# Altium PCB PCB.PcbDoc (part 2 of 2)
Units mm, origin at the board's own origin, x right, y up, seen from the top; angles counter-clockwise.
Board outline 57.59 x 65.03 mm, 2 copper layers (Top Layer, Bottom Layer); 72 components, 52 nets, 225 pads, 55 vias.
Unrouted connection lines stored in the file: 25.
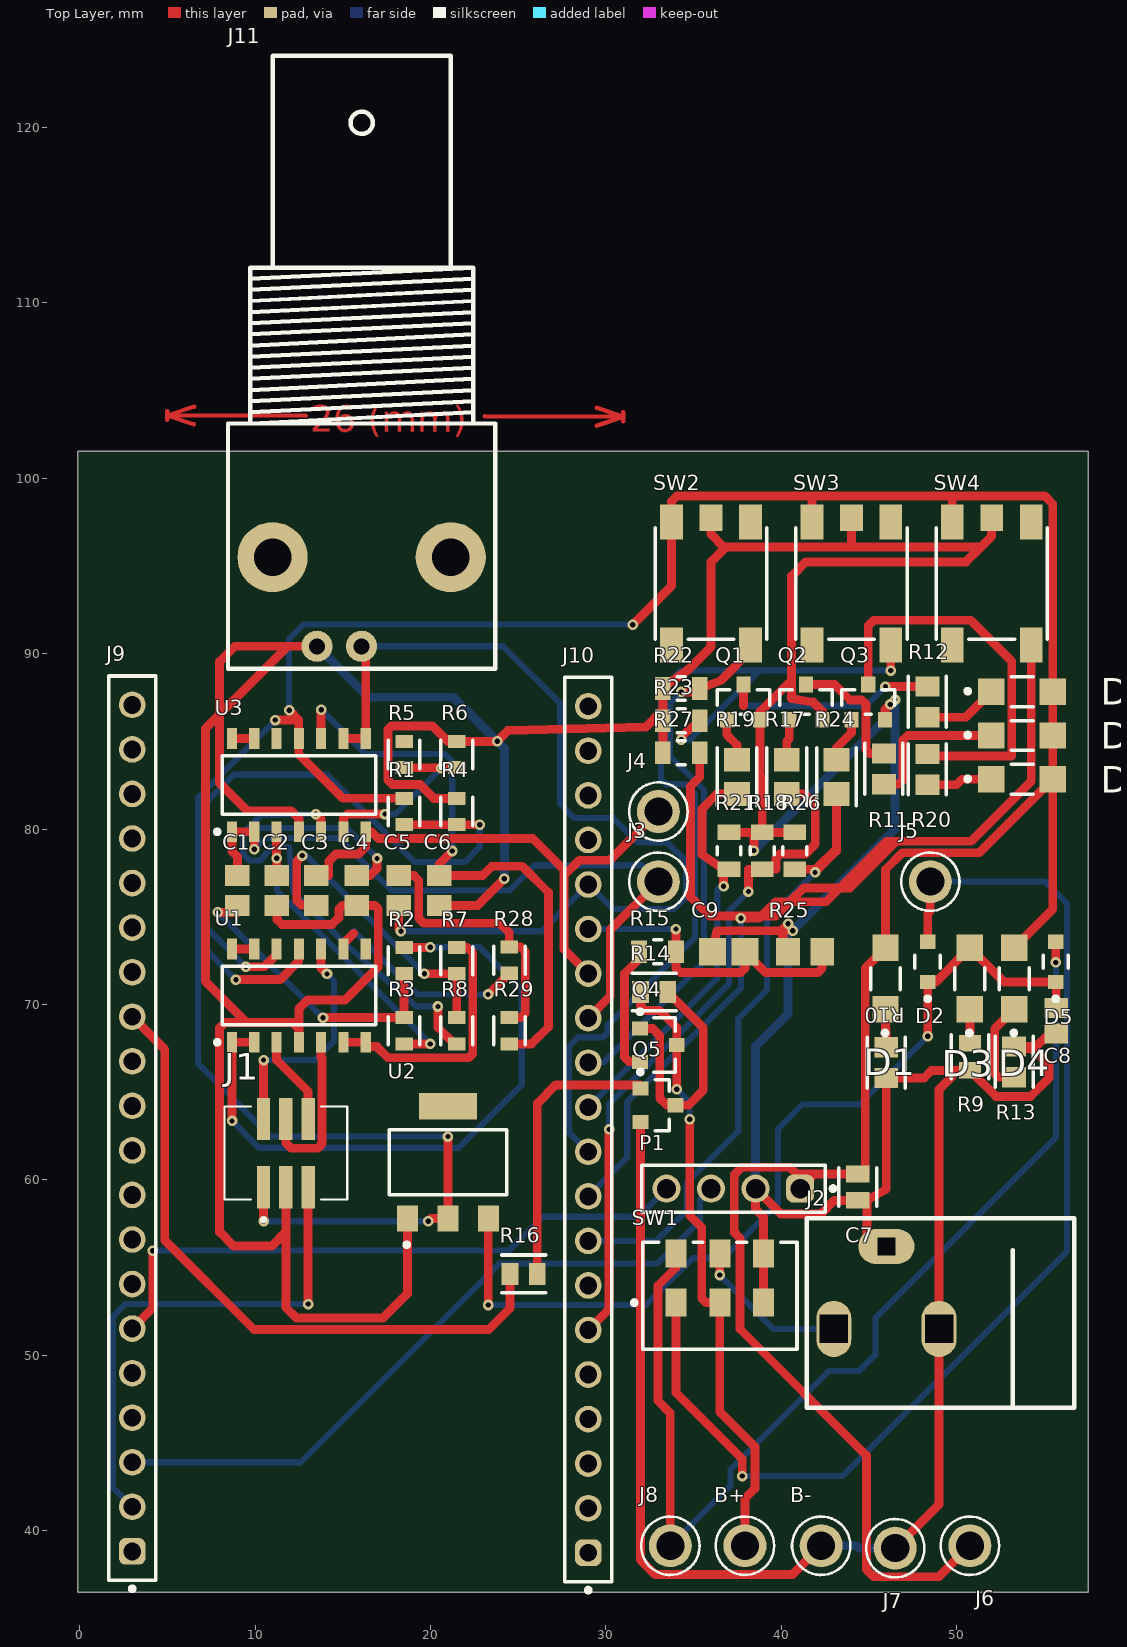
[diagram p0: Top Layer view]

## Via types
v1: diameter 0.6, hole 0.3, Top Layer to Bottom Layer, 55 vias

## Nets (pads, with @x,y where several pads share a name; then routed paths per layer and width w, separated by ;. In a path a pad name is that pad's centre, name@x,y a point inside that pad or via, vN(x,y) a via of type N, cw(c..) or ccw(c..) an arc to the next point about the centre after c; other vN are vias at no path point) (continued)
NetQ4_1: (continued)
  Top Layer w0.5: Q4.1 32.672,68.631 33.078,68.225 33.078,64.659 33.485,64.252 Q5.3 34.712,64.252 35.562,65.102 35.562,68.663 33.528,70.696 R14.2
NetQ4_2: Q4.2 R15.1 | length 7.3
  Top Layer w0.5: R15.1 31.9,72.591 31.072,71.763 31.072,66.988 31.329,66.731 Q4.2
NetQ5_1: Q5.1 R16.2 | length 16.2
  Top Layer w0.5: R16.2 26.088,64.346 27.155,65.413 31.97,65.413 Q5.1
NetR1_2: R1.2 R4.1 U1.12 | length 36.9
  Top Layer w0.5: v1(9.482,72.144) 10.519,72.144 11.23,72.855 U1.12 ; R1.2 R4.1 v1(22.817,80.25)
  Bottom Layer w0.35: v1(9.482,72.144) 7.254,74.372 7.254,81.55 8.796,83.092 14.13,83.092 19.108,78.113 21.953,78.113 22.817,78.977 v1(22.817,80.25)
NetR2_1: R2.1 U1.1 U1.2 | length 37.5
  Top Layer w0.5: v1(8.69,63.36) U1.1 U1.2 ; R2.1 19.986,73.25 v1(19.997,73.262)
  Bottom Layer w0.35: v1(8.69,63.36) 10.218,61.832 21.623,61.832 25.204,65.413 25.204,70.874 22.817,73.262 v1(19.997,73.262)
NetR5_1: R5.1 R6.1 U3.6 | length 10.6
  Top Layer w0.5: U3.6 15.04,80.602 15.294,80.856 v1(17.407,80.856) ; R5.1 v1@20.634,83.5 ; v1(20.607,83.473) v1@20.634,83.5 ; R6.1 v1@20.634,83.5
  Bottom Layer w0.35: v1(17.407,80.856) 17.991,80.856 v1(20.607,83.473)
NetR7_1: R7.1 U1.6 U1.7 | length 14.8
  Top Layer w0.5: U1.6 U1.7 16.31,67.598 16.949,67.598 17.584,66.963 22.182,66.963 22.41,67.191 22.41,72.945 22.106,73.25 R7.1
NetR28_1: R28.1 U1.9 | length 12.2
  Top Layer w0.5: U1.9 15.04,73.465 15.629,74.054 ; v1(23.288,70.569) 24.493,71.775 R28.1
  Bottom Layer w0.35: 15.629,74.054 15.629,74.202 19.261,70.569 v1(23.288,70.569)
NetU1_13: U1.13 U1.14 | length 1.3
  Top Layer w0.5: U1.14 U1.13
NetU3_13: U3.13 U3.14 | length 1.3
  Top Layer w0.5: U3.14 U3.13
pads on no net: J9.1 J9.4 J9.5 J9.7 J9.8 J9.9 J9.10 J9.11 J9.12 J9.14 J9.15 J9.16 J9.17 J9.18 J9.19 J9.20 J10.1 J10.2 J10.3 J10.4 J10.5 J10.7 J10.17 J10.18 J10.19 J10.20 J11. R5.2 SW2.A2 SW2.B1 SW3.A2 SW3.B1 SW4.A2 SW4.B1 U1.8 U2.4 U3.12
copper on no net: | length 23.2
  Top Layer w0.254: 4.999,103.326 5.001,103.834 ; 6.522,103.067 5,103.58 ; 6.526,104.083 5,103.58 ; 12.896,103.556 5,103.58 ; 23.104,103.524 31,103.5 ; 29.474,102.997 31,103.5 ; 29.478,104.013 31,103.5 ; 30.999,103.246 31.001,103.754

## Other copper
Top Layer:
  text "26 (mm)" at 13.147,102.641 h1.52 r359.82

## Silkscreen, mask and mechanical layers (free items; w line width, h text height)
Top Overlay:
  drawing of 11 lines, arcs and shapes, not listed